# Altium PCB STM32_Board.PcbDoc (part 2 of 2)
Units mil, origin at the board's own origin, x right, y up, seen from the top; angles counter-clockwise.
Board outline 3248.03 x 2755.91 mil, 2 copper layers (Top Layer, Bottom Layer), stack 60.433 mil thick; 70 components, 76 nets, 326 pads, 150 vias.
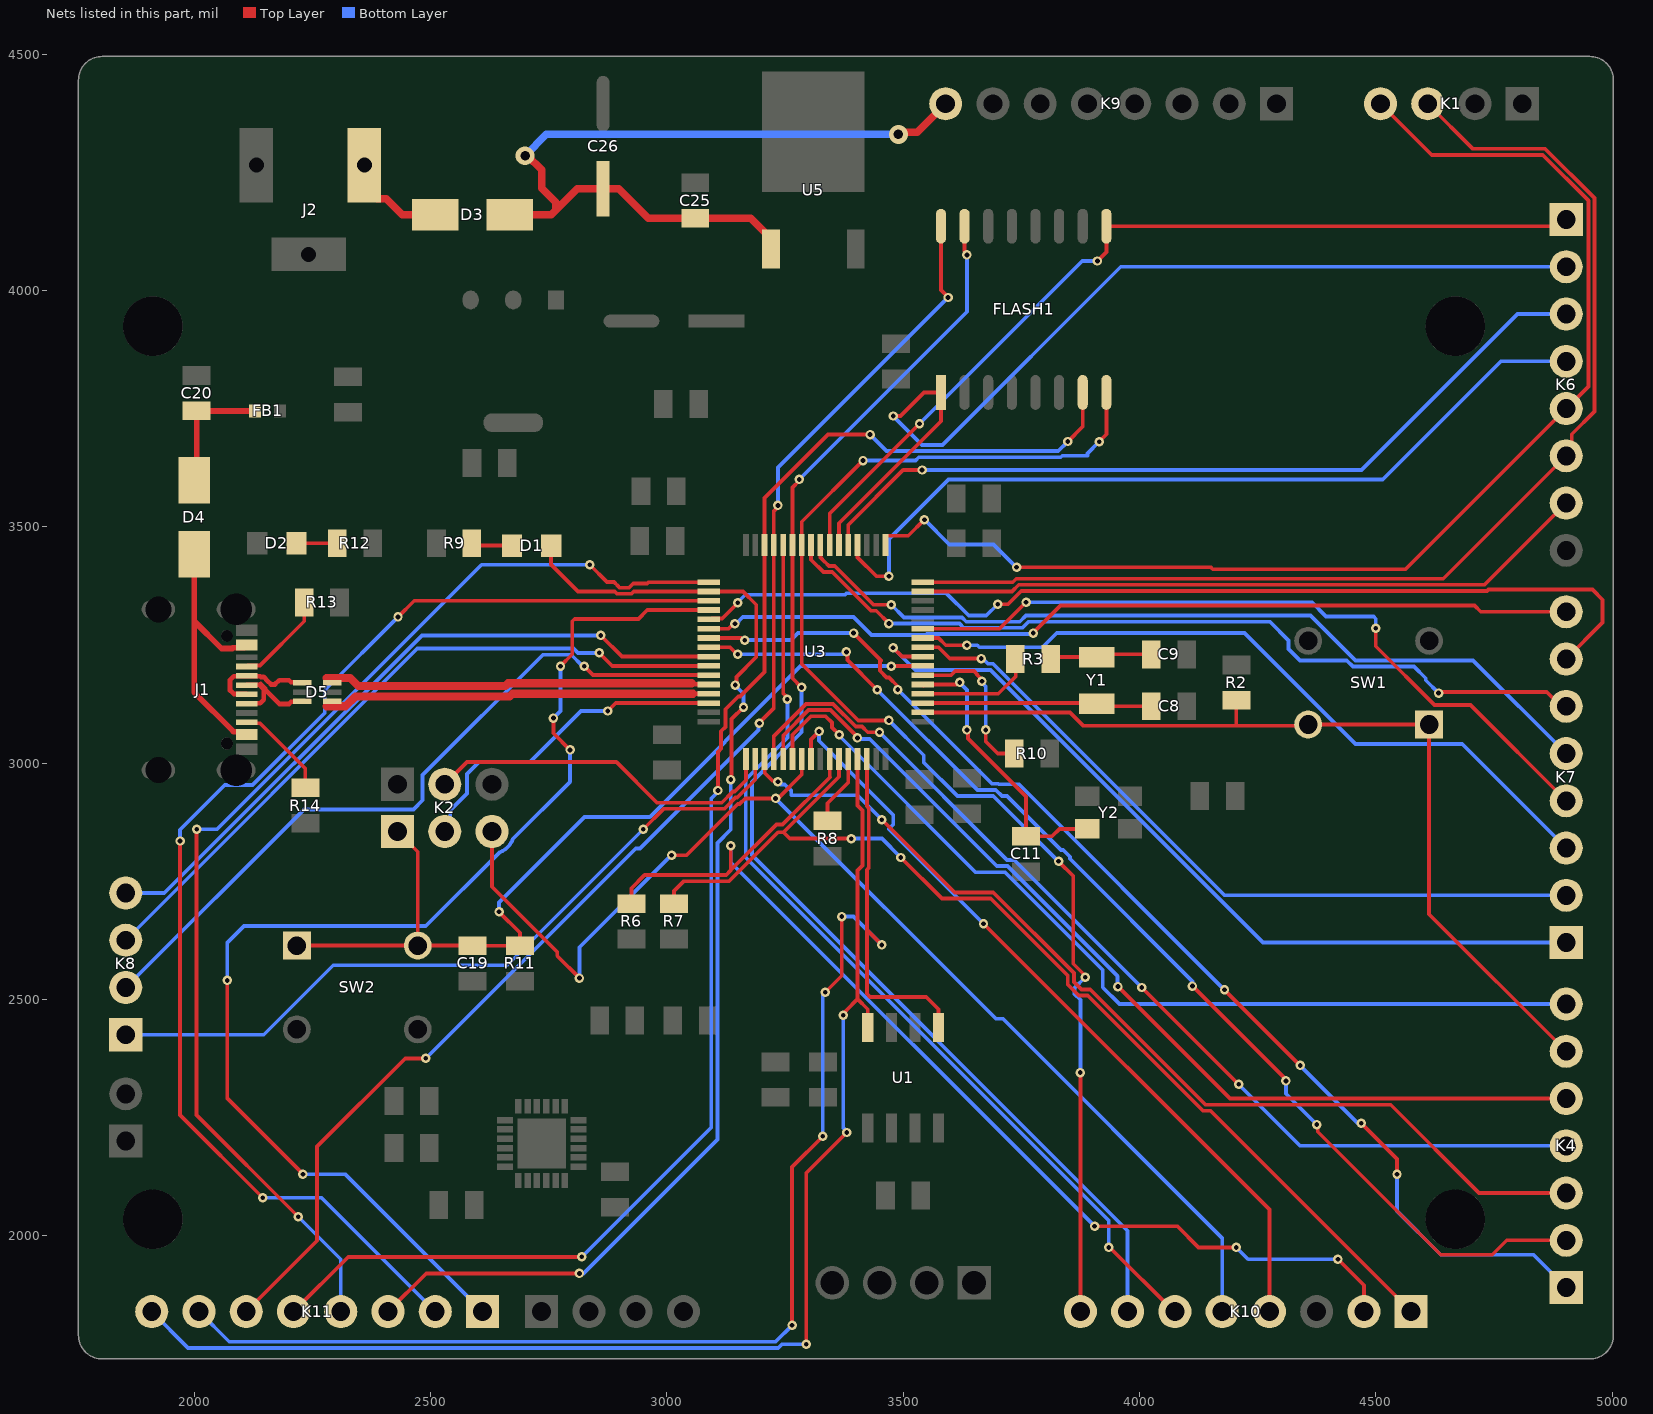
[diagram p2: the nets of this part, all layers, seen from the top]

## Via types
v1: diameter 20, hole 10, Top Layer to Bottom Layer, 139 vias
v2: diameter 59.06, hole 39.37, Top Layer to Bottom Layer, 5 vias
v3: diameter 19.68, hole 7.87, Top Layer to Bottom Layer, 4 vias
v4: diameter 40, hole 20, Top Layer to Bottom Layer, 2 vias

## Nets (pads, with @x,y where several pads share a name; then routed paths per layer and width w, separated by ;. In a path a pad name is that pad's centre, name@x,y a point inside that pad or via, vN(x,y) a via of type N, cw(c..) or ccw(c..) an arc to the next point about the centre after c; other vN are vias at no path point) (continued)
LED_Power_A: D2.2 R12.1 | length 86.3
  Top Layer w8: D2.2@2216.34,3465 R12.1@2302.6,3465
MCU_BOOT_0: R8.1 U3.60 | length 149.4
  Top Layer w8: R8.1@3340,2877.4 3340,2915 3383.9,2958.9 U3.60@3383.9,3008.62
MCU_CAN1_RX: K11.8 U1.4 U3.61 | length 2787.6
  Top Layer w8: v1(3295,1770) 3295,2132.7 v1(3380.49,2218.19) ; v1(3373.04,2466.33) 3373.04,2469.58 3378.88,2475.41 3378.88,2475.6 3403.58,2500.31 ; U3.61@3403.58,3008.62 3403.58,2910.06 3414,2899.65 3414,2783.13 3403.58,2772.72 3403.58,2500.31 ; U1.4@3425,2440 3425,2478.89 3403.58,2500.31
  Bottom Layer w8: K11.8@1910,1839.09 1986.87,1762.22 3235.61,1762.22 3243.38,1770 v1(3295,1770) ; v1(3373.04,2466.33) 3373.04,2228.88 3380.49,2221.43 v1(3380.49,2218.19)
MCU_CAN1_TX: K11.7 U1.1 U3.62 | length 3063.3
  Top Layer w8: v1(3265,1810) 3265,2145 v1(3330,2210) ; v1(3335,2515) 3370,2550 v1(3370,2675) ; U3.62@3423.27,3008.62 3423.27,2908.76 3427,2905.03 3427,2777.75 3423.27,2774.02 3423.27,2646.73 ; v1(3455,2615) 3423.27,2646.73 ; U1.1@3575,2440 3575,2478.89 3548.89,2505 3430,2505 3423.27,2511.73 3423.27,2646.73
  Bottom Layer w8: K11.7@2010,1839.09 2073.87,1775.22 3230.22,1775.22 v1(3265,1810) ; v1(3330,2210) 3330,2510 v1(3335,2515) ; v1(3370,2675) 3395,2675 v1(3455,2615)
MCU_LED_A: D1.2 R9.2 | length 87
  Top Layer w8: R9.2@2592.4,3460 D1.2@2672.32,3460
  Top Layer w12: R9.2@2587.4,3465 R9.2@2592.4,3460
MCU_LED_K: D1.1 K11.3 U3.34 | length 2541.1
  Top Layer w8: K11.3@2410,1839.09 2490.91,1920 v1(2815,1920) ; D1.1@2755,3460 2755,3420 2812.05,3362.95 2889.72,3362.95 2890.14,3362.53 2894.67,3358 2925.33,3358 2930.28,3362.95 3160.99,3362.95 3189,3334.94 3189,3224 3147.3,3182.3 3147.3,3167.3 v1(3145,3165) ; v1(3135,2965) 3137,2967 3137,3092.94 v1(3162.18,3118.12)
  Bottom Layer w8: v1(2815,1920) 2823.75,1920 3107,2203.25 3107,2830.94 3135,2858.94 v1(3135,2965) ; v1(3145,3165) 3145,3163.65 3162.18,3146.47 v1(3162.18,3118.12)
MCU_NRST: C19.2 K2.1 R11.2 SW2.1 SW2.2 U3.7 | length 1945.1
  Top Layer w8: SW2.1@2217.05,2613.58 SW2.2@2472.95,2613.58 ; K2.1@2430,2855 2472.95,2812.05 SW2.2@2472.95,2613.58 ; v1(2645,2685) 2689,2641 R11.2@2689,2613.15 C19.2@2589,2613.15 2588.57,2613.58 SW2.2@2472.95,2613.58 ; v1(3475,3205) 3475.24,3205.24 3541.14,3205.24 U3.7@3541.38,3205.47
  Bottom Layer w8: v1(2645,2685) 2645,2705 2826,2886 2964,2886 3283,3205 v1(3475,3205)
MCU_OSC32_IN: C8.2 U3.3 Y1.2 | length 486.6
  Top Layer w8: U3.3@3541.38,3126.73 3909.06,3126.73 Y1.2@3910,3125.79 3915.79,3120 C8.2@4025.2,3120
MCU_OSC32_OUT: R3.1 U3.4 | length 249.1
  Top Layer w8: U3.4@3541.38,3146.42 3701.42,3146.42 3738.16,3183.16 3738.16,3219.44 R3.1@3737.6,3220
MCU_OSC_IN: C11.2 U3.5 Y2.3 | length 624.5
  Top Layer w8: U3.5@3543.19,3164.29 U3.5@3541.38,3166.1 3612.44,3166.1 3616.75,3170.42 v1(3620,3170.42) ; v1(3635,3070.05) 3637.3,3067.75 3637.3,3051.7 3760,2928.99 C11.2@3760,2845 3815,2845 3830.55,2860.55 Y2.3@3889.72,2860.55 Y2.3@3874.17,2845
  Bottom Layer w8: v1(3620,3170.42) 3620,3169.3 3635,3154.3 v1(3635,3070.05)
MCU_OSC_OUT: R10.2 U3.6 | length 342.1
  Top Layer w8: U3.6@3541.38,3185.79 3601.43,3185.79 3610.06,3194.42 3649.69,3194.42 3656.17,3187.94 3656.17,3186.77 3666.69,3176.25 v1(3666.69,3173) ; v1(3675,3070.05) 3675,3045 3700,3020 R10.2@3735,3020
  Bottom Layer w8: v1(3666.69,3173) 3666.69,3169.75 3675,3161.45 v1(3675,3070.05)
MCU_PA1: K6.7 U3.15 | length 1439.1
  Top Layer w8: U3.15@3541.38,3362.95 3730.63,3362.95 3744.67,3377 4730.03,3377 K6.7@4903.03,3550
MCU_PA4: K6.4 U3.20 | length 1777.2
  Top Layer w8: U3.20@3403.58,3461.38 3403.58,3434.77 3443.35,3395 v1(3470,3395)
  Bottom Layer w8: v1(3470,3395) 3470,3473.94 3596.06,3600 4515,3600 4765,3850 K6.4@4903.03,3850
MCU_PA5: K6.3 U3.21 | length 1749
  Top Layer w8: U3.21@3385.71,3463.19 U3.21@3383.9,3461.38 3383.9,3503.9 3500,3620 v1(3540,3620)
  Bottom Layer w8: v1(3540,3620) 4470.13,3620 4800.13,3950 K6.3@4903.03,3950
MCU_PA8: K8.4 U3.41 | length 1477.9
  Top Layer w8: v1(2860,3270) 2904.84,3225.16 U3.41@3088.62,3225.16
  Bottom Layer w8: K8.4@1855,2725 1936.62,2725 2481.61,3270 v1(2860,3270)
MCU_PA9: K8.3 U3.42 | length 1504.3
  Top Layer w8: v1(2856.97,3233.03) 2884.53,3205.47 U3.42@3088.62,3205.47
  Bottom Layer w8: K8.3@1855,2625 2472,3242 2803.14,3242 2812.11,3233.03 v1(2856.97,3233.03)
MCU_PA10: K8.2 U3.43 | length 1574.2
  Top Layer w8: v1(2825,3205) 2843.56,3186.44 3087.97,3186.44 U3.43@3088.62,3185.79
  Bottom Layer w8: K8.2@1855,2525 2231.87,2901.87 2463.67,2901.87 2483.13,2921.33 2483.13,2974.42 2737.71,3229 2797.75,3229 2821.75,3205 v1(2825,3205)
MCU_PA15: K8.1 U3.50 | length 1599.5
  Top Layer w8: v1(2950,2860) 2993,2903 3121.62,2903 3145.33,2926.71 3149.04,2926.71 3187.05,2964.72 U3.50@3187.05,3008.62
  Bottom Layer w8: K8.1@1855,2425 2147.08,2425 2294.26,2572.18 2662.18,2572.18 v1(2950,2860)
MCU_PB2: K10.6 U3.28 | length 2040.9
  Top Layer w8: U3.28@3246.1,3461.38 3246.1,3147.14 3255,3138.25 v1(3255,3135) ; v1(3935,1975) 3937.05,1975 4072.95,1839.09 K10.6@4075,1839.09
  Bottom Layer w8: v1(3255,3135) 3255,3053.38 3167,2965.38 3167,2800.05 3935,2032.05 v1(3935,1975)
MCU_PB4: K10.4 U3.56 | length 1694.9
  Top Layer w8: U3.56@3305.16,3008.62 3305.16,3049.86 v1(3322.03,3066.74) ; v1(3670,2660) 4275,2055 K10.4@4275,1839.09
  Bottom Layer w8: v1(3322.03,3066.74) 3322.03,3046.91 3479,2889.94 3479,2870.06 3470,2861.06 3470,2860 v1(3670,2660)
MCU_PB12: K11.4 U3.33 | length 2487.7
  Top Layer w8: v1(2005,2860) 2005,2255 v1(2220,2040) ; v1(2836.99,3419.66) 2873.62,3383.03 2888.03,3383.03 2890,3381.06 2890.53,3380.53 2895,3376.06 2895.53,3375.53 2900.06,3371 2919.94,3371 2928.94,3380 2958.46,3380 2961.1,3382.64 U3.33@3088.62,3382.64
  Bottom Layer w8: v1(2005,2860) 2048.45,2860 2608.11,3419.66 v1(2836.99,3419.66) ; v1(2220,2040) 2310,1950 K11.4@2310,1839.09
MCU_PB14: K11.2 U3.35 | length 2663.6
  Top Layer w8: v1(1970,2835) 1970,2255 v1(2145,2080) ; v1(2431.09,3309.05) 2465.3,3343.27 U3.35@3088.62,3343.27
  Bottom Layer w8: v1(1970,2835) 1970,2858.94 2064.42,2953.36 2123.43,2953.36 2276.11,3106.04 2276.11,3154.07 v1(2431.09,3309.05) ; v1(2145,2080) 2269.09,2080 K11.2@2510,1839.09
MCU_PB15: K11.1 U3.36 | length 2593.5
  Top Layer w8: v1(2070,2540) 2070,2290 v1(2230,2130) ; v1(2760,3095) 2760,3062.79 v1(2795.13,3027.66) ; v1(2775,3205) 2800,3230 2800,3300 2805,3305 2940,3305 2958.58,3323.58 U3.36@3088.62,3323.58
  Bottom Layer w8: v1(2070,2540) 2070,2620 2105,2655 2490,2655 2645.91,2810.91 ccw(c2630,2855) 2674.09,2839.09 2795.13,2960.13 v1(2795.13,3027.66) ; v1(2230,2130) 2319.09,2130 K11.1@2610,1839.09 ; v1(2760,3095) 2775,3110 v1(2775,3205)
MCU_PC0: K7.1 U3.8 | length 1753.4
  Top Layer w8: v1(3478.63,3243.96) 3497.43,3225.16 U3.8@3541.38,3225.16
  Bottom Layer w8: v1(3478.63,3243.96) 3525.59,3197 3684.62,3197 4261.62,2620 K7.1@4903.03,2620
MCU_PC1: K7.2 U3.9 | length 1579.1
  Top Layer w8: U3.9@3541.38,3244.84 3574.58,3244.84 3598.43,3221 v1(3665,3221)
  Bottom Layer w8: v1(3665,3221) 3668.25,3221 3679.25,3210 3690,3210 4180,2720 K7.2@4903.03,2720
MCU_PC2: K7.3 U3.10 | length 1570.6
  Top Layer w8: U3.10@3541.38,3264.53 3574.53,3264.53 3590.06,3249 v1(3635,3249)
  Bottom Layer w8: v1(3635,3249) 3657,3249 3661,3245 3795,3245 3825,3275 4222.02,3275 4457,3040.02 4683.02,3040.02 K7.3@4903.03,2820
MCU_PC3: K7.4 U3.11 | length 1592.8
  Top Layer w8: U3.11@3541.38,3284.21 3704.21,3284.21 v1(3760,3340) ; v1(4500,3285) 4500,3247.12 4624.3,3122.82 4700.21,3122.82 K7.4@4903.03,2920
  Bottom Layer w8: v1(3760,3340) 4365,3340 4395,3310 4495.31,3310 4500,3305.31 v1(4500,3285)
MCU_PC4: K7.5 U3.24 | length 1787.4
  Top Layer w8: U3.24@3324.84,3461.38 3324.84,3434.77 3333.61,3426 3334,3426 3343,3417 3355.33,3417 3437.33,3335 v1(3475,3335)
  Bottom Layer w8: v1(3475,3335) 3502,3308 3624.38,3308 3633.38,3299 3746.67,3299 3759.67,3312 4362.18,3312 4457,3217.18 4705.85,3217.18 K7.5@4903.03,3020
MCU_PC5: K7.6 U3.25 | length 1782.7
  Top Layer w8: U3.25@3305.16,3461.38 3305.16,3430.24 3331.39,3404 3349.94,3404 3431.94,3322 3443,3322 v1(3470,3295) ; v1(4633.03,3148.03) 4635,3150 4861.97,3150 4891.97,3120 K7.6@4903.03,3120
  Bottom Layer w8: v1(3470,3295) 3618.99,3295 3627.99,3286 3752.06,3286 3765.06,3299 4276,3299 4315.65,3259.35 4315.65,3241.43 4339.9,3217.18 4438.61,3217.18 4451.61,3204.18 4580.82,3204.18 4605.78,3179.22 4605.78,3175.28 v1(4633.03,3148.03)
MCU_PC6: K7.7 U3.37 | length 2116.2
  Top Layer w8: U3.37@3095,3305.71 3117.04,3305.71 3150,3338.67 v1(3150,3338.95) ; v1(3700,3336) 3722.06,3336 3750.06,3364 4735.42,3364 4738.29,3366.87 4958.44,3366.87 4980,3345.31 4980,3296.97 K7.7@4903.03,3220
  Bottom Layer w8: v1(3150,3338.95) 3150,3340 3166,3356 3377.38,3356 3380.38,3359 3591.76,3359 3638.76,3312 3676,3312 v1(3700,3336)
MCU_PC7: K7.8 U3.38 | length 1871.5
  Top Layer w8: U3.38@3088.62,3284.21 3130.66,3284.21 3140.87,3294.42 v1(3144.12,3294.42) ; v1(3775,3275) 3832.98,3332.98 4709.17,3332.98 4722.14,3320 K7.8@4903.03,3320
  Bottom Layer w8: v1(3144.12,3294.42) 3146.06,3294.42 3160.65,3309 3394.94,3309 3432.94,3271 3548.5,3271 3550.5,3273 3773,3273 v1(3775,3275)
MCU_PC8: K4.1 U3.39 | length 2480.7
  Top Layer w8: U3.39@3088.62,3264.53 3088.86,3264.76 3156.99,3264.76 3161.75,3260 v1(3165,3260) ; v1(3395,3275) 3453.03,3216.97 3451,3214.94 3451,3195.06 3465.06,3181 3470,3181 3488.59,3162.41 v1(3488.59,3155.43) ; v1(4180,2520) v1(4340,2360) ; v1(4469.62,2237.46) 4545,2162.08 v1(4545,2130)
  Bottom Layer w8: v1(3165,3260) 3262.5,3260 3277.5,3275 v1(3395,3275) ; v1(3488.59,3155.43) 3688.02,2956 3701.41,2956 3702.29,2955.12 3744.88,2955.12 v1(4180,2520) ; v1(4340,2360) 4462.54,2237.46 v1(4469.62,2237.46) ; v1(4545,2130) 4545,2051.88 4637.38,1959.5 4833.53,1959.5 K4.1@4903.03,1890
MCU_PC9: K4.2 U3.40 | length 2406.2
  Top Layer w8: U3.40@3088.62,3244.84 3133.73,3244.84 3148.57,3230 v1(3150,3230) ; v1(3380,3235) 3382.3,3232.7 3382.3,3217.7 v1(3445,3155) ; v1(4112.18,2527.92) 4310.01,2330.08 v1(4310.01,2327.35) ; v1(4375,2235) 4377.3,2232.7 4377.3,2219.58 4637.38,1959.5 4746.57,1959.5 4777.06,1990 K4.2@4903.03,1990
  Bottom Layer w8: v1(3150,3230) 3371.75,3230 3376.75,3235 v1(3380,3235) ; v1(3445,3155) 3657,2943 3696.02,2943 3709.02,2930 3720,2930 3834.15,2815.85 3838.73,2815.85 3852.79,2801.79 3852.79,2797.21 4112.18,2537.82 v1(4112.18,2527.92) ; v1(4310.01,2327.35) 4310.01,2299.99 v1(4375,2235)
MCU_PC10: K4.3 U3.51 | length 2110.2
  Top Layer w8: U3.51@3206.73,3008.62 3207.21,3008.15 3207.21,2978.63 3223.32,2962.52 3232.67,2962.52 v1(3234.97,2960.22) ; v1(3455,2880) 3609,2726 3690.77,2726 3861.23,2555.54 3861.23,2536.78 3877.07,2520.95 3895.82,2520.95 4139.77,2277 4531.63,2277 4718.63,2090 K4.3@4903.03,2090
  Bottom Layer w8: v1(3234.97,2960.22) 3240.63,2954.56 3249.38,2954.56 3263.44,2940.5 3263.44,2931.74 3403.26,2931.74 v1(3455,2880)
MCU_PC11: K4.4 U3.52 | length 2140.5
  Top Layer w8: U3.52@3226.42,3008.62 3226.42,3057.13 3294.29,3125 3351.62,3125 3399.62,3077 3413.22,3077 3425.22,3065 v1(3450,3065) ; v1(4005,2525) v1(4210,2320)
  Bottom Layer w8: v1(3450,3065) 3720,2795 3735,2795 v1(4005,2525) ; v1(4210,2320) 4340,2190 K4.4@4903.03,2190
MCU_PC12: K4.5 U3.53 | length 2083
  Top Layer w8: U3.53@3246.1,3008.62 3246.1,3058.43 3299.67,3112 3346.23,3112 3403.28,3054.95 v1(3403.28,3053) ; v1(3954.52,2526.96) 4191.48,2290 K4.5@4903.03,2290
  Bottom Layer w8: v1(3403.28,3053) 3405.56,3050.72 3429.28,3050.72 3698,2782 3720.67,2782 3953.7,2548.96 3953.7,2527.77 v1(3954.52,2526.96)
MCU_PD2: K4.7 U3.54 | length 1985.8
  Top Layer w8: U3.54@3265.79,3008.62 3265.79,3059.73 3305.06,3099 3336,3099 3349.17,3085.83 3349.17,3075.29 3364.64,3059.82 v1(3364.64,3059.64)
  Bottom Layer w8: v1(3364.64,3059.64) 3364.64,3057.69 3653.34,2769 3715.28,2769 3922.23,2562.05 3922.23,2525.3 3957.54,2490 K4.7@4903.03,2490
MCU_QUADSPI_BK1_IO0: FLASH1.15 K10.7 U3.27 | length 2832.5
  Top Layer w8: v1(3280,3600) 3280,3597.31 3265.79,3583.1 U3.27@3265.79,3461.38 3265.79,3179.21 v1(3285,3160) ; FLASH1.15@3630,4135.83 3630,4083.25 3635,4078.25 v1(3635,4075)
  Bottom Layer w8: v1(3280,3600) 3635,3955 v1(3635,4075) ; v1(3285,3160) 3285,3065 3180,2960 3180,2805.44 3975,2010.44 K10.7@3975,1839.09
MCU_QUADSPI_BK1_IO1: FLASH1.8 K10.8 U3.26 | length 2830.6
  Top Layer w8: v1(3415,3640) 3285.47,3510.47 U3.26@3285.47,3461.38 3285.47,3209.53 3405,3090 v1(3470,3090) ; v1(3828.79,2791.85) 3860,2760.64 3860,2575.15 3885.23,2549.92 v1(3885.23,2546.72) ; K10.8@3875,1839.09 v1(3875,2345) ; v1(3914.71,3679.77) 3914.71,3680.3 3930,3695.59 FLASH1.8@3930,3784.17
  Bottom Layer w8: v1(3415,3640) 3526.06,3640 3533.06,3647 3833.58,3647 3836.58,3650 3890,3650 3890,3655.07 v1(3914.71,3679.77) ; v1(3470,3090) 3543.65,3016.35 3543.65,3001.35 3615,2930 3690.64,2930 v1(3828.79,2791.85) ; K10.8@3874.31,1839.78 K10.8@3875,1839.09 ; v1(3875,2345) 3875,2498.89 3862.76,2511.13 3862.76,2524.25 v1(3885.23,2546.72)
MCU_QUADSPI_BK1_IO2: FLASH1.9 K6.1 U3.23 | length 1914.7
  Top Layer w8: U3.23@3344.53,3461.38 3344.53,3527.69 v1(3534.62,3717.79) ; v1(3911.18,4062.22) 3930,4081.04 FLASH1.9@3930,4135.83 4888.86,4135.83 K6.1@4903.03,4150
  Bottom Layer w8: v1(3534.62,3717.79) 3879.06,4062.22 v1(3911.18,4062.22)
MCU_QUADSPI_BK1_IO3: FLASH1.1 K6.2 U3.22 | length 2151.9
  Top Layer w8: U3.22@3362.4,3450 3364.21,3451.81 U3.22@3364.21,3461.38 3364.21,3507.28 3580,3723.07 3580,3757.95 FLASH1.1@3580,3784.17 3544.17,3784.17 3494.21,3734.21 v1(3478.81,3734.21)
  Bottom Layer w8: v1(3478.81,3734.21) 3540.02,3673 3583.29,3673 3960.29,4050 K6.2@4903.03,4050
MCU_QUADSPI_CLK: FLASH1.16 K11.6 U3.29 | length 2948.7
  Top Layer w8: K11.6@2110,1839.09 2259.93,1989.02 2259.93,2188.34 2446.59,2375 v1(2490,2375) ; v1(3195.97,3084.03) 3195.97,3085.97 3226.42,3116.42 U3.29@3226.42,3461.38 3226.42,3533.17 3235,3541.75 v1(3235,3545) ; FLASH1.16@3580,4135.83 3580,4001.11 3595,3986.11 v1(3595,3985)
  Bottom Layer w8: v1(2490,2375) 2934,2819 2942.94,2819 3193.68,3069.73 3193.68,3081.73 v1(3195.97,3084.03) ; v1(3235,3545) 3235,3625 v1(3595,3985)
MCU_QUADSPI_NCS: FLASH1.7 K11.5 U3.30 | length 3263.3
  Top Layer w8: K11.5@2210,1839.09 2325.91,1955 v1(2820,1955) ; v1(3108.14,2941.86) 3108.14,3023.46 3114.69,3030 3114.69,3067.13 3124,3076.44 3124,3113.88 3151.12,3141 3154.94,3141 3206.73,3192.79 U3.30@3206.73,3461.38 3206.73,3560.67 3341.06,3695 v1(3430,3695) ; v1(3848.52,3680.33) 3880,3711.81 FLASH1.7@3880,3784.17
  Bottom Layer w8: v1(2820,1955) 3094,2229 3094,2924.89 3108.14,2939.03 v1(3108.14,2941.86) ; v1(3430,3695) 3465,3660 3828.19,3660 v1(3848.52,3680.33)
MCU_SCL_1: K10.2 R6.2 U3.58 | length 2445.3
  Top Layer w8: R6.2@2925,2702.4 2925,2735 2953,2763 3125.51,2763 3135,2772.49 3135,2772.9 ; v1(3135,2825) 3135,2772.9 ; U3.58@3342.72,3006.81 U3.58@3344.53,3008.62 3344.53,2970.47 3345,2970 3245,2870 3232.1,2870 3135,2772.9 ; v1(3905,2020) 4080,2020 4125,1975 v1(4205,1975) ; v1(4420,1950) 4475,1895 K10.2@4475,1839.09
  Bottom Layer w8: v1(3135,2825) 3135,2790 v1(3905,2020) ; v1(4205,1975) 4230,1950 v1(4420,1950)
MCU_SDA_1: K10.1 R7.2 U3.59 | length 2273.2
  Top Layer w8: R7.2@3015,2702.4 3015.39,2702.79 3015.39,2729.4 3035.99,2750 3132.2,2750 3235.49,2853.29 3246.71,2853.29 ; U3.59@3364.21,3008.62 3364.21,2970.79 3246.71,2853.29 ; v1(3390,2840) 3260,2840 3246.71,2853.29 ; v1(3495,2800) 3582,2713 3685.38,2713 3848.23,2550.15 3848.23,2531.4 3871.68,2507.95 3890.43,2507.95 4134.38,2264 4150.09,2264 K10.1@4575,1839.09
  Bottom Layer w8: v1(3390,2840) 3455,2840 v1(3495,2800)
MCU_SWCLK: K2.4 U3.49 | length 757.2
  Top Layer w8: K2.4@2530,2955 2576.87,3001.87 2893.13,3001.87 2979,2916 3116.23,2916 3139.94,2939.71 3143.65,2939.71 3167.36,2963.42 U3.49@3167.36,3008.62
MCU_SWDIO: K2.3 U3.46 | length 731.6
  Top Layer w8: v1(2875,3110) 2891.73,3126.73 U3.46@3088.62,3126.73
  Bottom Layer w8: K2.3@2541.86,2843.14 K2.3@2530,2855 2541.86,2866.86 2541.86,2900.57 2576.87,2935.58 2576.87,2976.44 2602.5,3002.06 2710.43,3002.06 2818.37,3110 v1(2875,3110)
MCU_SWITCH: K4.6 R2.2 SW1.1 SW1.2 U3.2 | length 1954.3
  Top Layer w8: U3.2@3541.38,3107.05 3852.89,3107.05 3881.34,3078.6 4205,3078.6 ; R2.2@4207.95,3129.65 R2.2@4205,3132.6 4205,3078.6 ; K4.6@4903.03,2390 4612.95,2680.08 SW1.1@4612.95,3081.42 SW1.2@4357.05,3081.42 4354.23,3078.6 4205,3078.6
MCU_SWO: K2.5 K10.5 U3.55 | length 2592.8
  Top Layer w8: K2.5@2630,2855 2630,2738.16 2768.07,2600.08 2768.07,2591.93 v1(2815,2545) ; v1(3010,2805) 3042,2805 3150,2913 3153.71,2913 3165.71,2925 v1(3230,2925) 3232.3,2927.3 3237.3,2927.3 3285.47,2975.47 U3.55@3285.47,3008.62
  Bottom Layer w8: v1(2815,2545) 2815,2610 v1(3010,2805) ; v1(3230,2925) 3696.15,2458.85 3711.15,2458.85 4175,1995 K10.5@4175,1839.09
MCU_USART2_RX: K1.4 K6.5 U3.17 | length 2641.4
  Top Layer w8: U3.17@3462.64,3461.38 3462.64,3478.88 3464.64,3480.88 3510.88,3480.88 v1(3545,3515) ; v1(3740,3414) 4151.14,3414 4155.14,3410 4563.03,3410 K6.5@4903.03,3750 4949.91,3796.87 4949.91,4189.92 4853.3,4286.53 4618.47,4286.53 K1.4@4510,4395
  Bottom Layer w8: v1(3545,3515) 3597.5,3462.5 3691.5,3462.5 v1(3740,3414)
MCU_USART2_TX: K1.3 K6.6 U3.16 | length 2478.1
  Top Layer w8: U3.16@3541.38,3382.64 3731.93,3382.64 3739.29,3390 4643.03,3390 K6.6@4903.03,3650 4914.9,3661.86 4914.9,3695.57 4962.91,3743.58 4962.91,4195.3 4858.68,4299.53 4705.47,4299.53 K1.3@4610,4395
NetJ1_A5: J1.A5 R13.2 | length 201
  Top Layer w8: J1.A5@2111.34,3204.21 2113.24,3206.12 2138.89,3206.12 2232.6,3299.82 R13.2@2232.6,3340
NetJ1_B5: J1.B5 R14.2 | length 204.9
  Top Layer w8: J1.B5@2111.34,3086.1 2113.24,3084.2 2138.89,3084.2 2235,2988.09 R14.2@2235,2947.4
USB_CONN_D_N: D5.1 J1.A7 J1.B7 | length 231.2
  Top Layer w10: J1.A7@2111.34,3145.16 2110.43,3146.06 2083.37,3146.06 2075.83,3153.6 2075.83,3176.08 2083.37,3183.62 2110.43,3183.62 J1.B7@2111.34,3184.53 2112.24,3183.62 2139.31,3183.62 2140.75,3182.19 2146.96,3182.19 2155.75,3173.4 2155.75,3172.97 2162.54,3166.18 2170.82,3166.18 2179.64,3175 2200.36,3175 2204.76,3170.59 2227.4,3170.59 D5.1@2228.31,3169.68
USB_CONN_D_P: D5.3 J1.A6 J1.B6 | length 211.7
  Top Layer w10: J1.B6@2111.34,3125.47 2112.24,3126.38 2139.31,3126.38 2146.85,3133.92 2146.85,3156.4 2139.31,3163.94 ; J1.A6@2111.34,3164.84 2112.24,3165.75 2139.31,3165.75 2140.75,3167.19 2140.75,3166.75 2150,3157.5 2150,3154.64 2179.64,3125 2200.36,3125 2204.76,3129.41 2227.4,3129.41 D5.3@2228.31,3130.32
USB_D_N: D5.6 U3.44 | length 819.1
  Top Layer w10: 3052.8,3168.83 3054.72,3166.91 3087.81,3166.91 U3.44@3088.62,3166.1
  Top Layer w17.23: 2280,3180 2330,3180 2346.9,3163.1 2658.27,3163.1 2664,3168.83 3052.8,3168.83
USB_D_P: D5.4 U3.45 | length 819.7
  Top Layer w10: 3055.66,3146.59 3088.44,3146.59 U3.45@3088.62,3146.42
  Top Layer w17.23: 2280,3120 2320,3120 2340.87,3140.87 2667.48,3140.87 2673.2,3146.59 3055.66,3146.59
VBUS: C20.2 D4.1 FB1.1 | length 272
  Top Layer w12: D4.1@2000,3598.74 2005,3603.74 C20.2@2005,3745.2 2005.2,3745 FB1.1@2128.43,3745
VBUS_IN: D4.2 J1.A4-B9 J1.B4-A9 | length 593.4
  Top Layer w12: 2000,3315 2000,3300.08 ; D4.2@2000,3441.26 2000,3300.08 ; J1.B4-A9@2111.34,3060.51 2105.53,3066.32 2082.95,3066.32 2000,3149.28 2000,3300.08 ; J1.A4-B9@2111.34,3249.49 2105.53,3243.68 2081.63,3243.68 2080.06,3242.11 2057.97,3242.11 2000,3300.08
VDC_IN: D3.2 J2.1 | length 218.9
  Top Layer w16: J2.1@2360,4265 2360,4221.69 2387.43,4194.26 2405.74,4194.26 2440,4160 D3.2@2510,4160
VIN: C25.1 C26.+ D3.1 K9.8 U5.1 | length 1738.5
  Top Layer w16: D3.1@2667.48,4160 2755,4160 2765,4170 ; v4(2700,4285) 2705,4285 2735,4255 2735,4216.51 2765,4186.51 2765,4170 ; C25.1@3081.53,4164.28 C25.1@3069.84,4152.6 ; U5.1@3220.24,4087.68 3220.24,4110.31 3177.95,4152.6 C25.1@3069.84,4152.6 ; v4(3490,4330) 3494.59,4334.59 3529.59,4334.59 K9.8@3590,4395 ; 2765,4170 2810,4215 C26.+@2865,4215 2897.9,4215 2960.3,4152.6 C25.1@3060,4152.6 C25.1@3069.84,4152.6
  Bottom Layer w16: v4(2700,4285) 2745,4330 v4(3490,4330)
XTAL32_IN: C9.2 R3.2 Y1.1 | length 216.7
  Top Layer w8: R3.2@3812.4,3220 3816.61,3224.21 Y1.1@3910,3224.21 3915.79,3230 C9.2@4025,3230
pads on no net: FLASH1.4 FLASH1.5 FLASH1.6 FLASH1.11 FLASH1.12 FLASH1.13 FLASH1.14 J1. J1.1 J1.2 J1.3 J1.4 J1.A8 J1.B8 U1.5 U1.8 U2.2 U2.3 U2.4 U2.5 U2.14 U2.15 U2.16 U2.17 U2.19 U2.21 U2.22

## Polygon pours and split planes (outlines as drawn)
GND on Bottom Layer "GND_L02_P003" (solid, pour order 3): 1755,1789.09 ccw(c1805,1789.09) 1805,1739.09 4953.03,1739.09 ccw(c4953.03,1789.09) 5003.03,1789.09 5003.03,4445 ccw(c4953.03,4445) 4953.03,4495 1805,4495 ccw(c1805,4445) 1755,4445
GND on Top Layer "GND_L01_P002" (solid, remove dead copper, pour order 2): 1755,1789.09 ccw(c1805,1789.09) 1805,1739.09 4953.03,1739.09 ccw(c4953.03,1789.09) 5003.03,1789.09 5003.03,4445 ccw(c4953.03,4445) 4953.03,4495 1805,4495 ccw(c1805,4445) 1755,4445

## Keep-outs
Top Layer:
  lines w12: 5002.95,4440.42 5003.03,1789.09 cw(c4953.03,1789.09) 4988.39,1753.74 4984.9,1750.26 cw(c4957.96,1777.21) 4957.96,1739.09 ; 5002.95,4445.2 ccw(c4953.23,4445.2) 4988.39,4480.36 ccw(c4953.03,4445) 4953.03,4495 1800.08,4495 ccw(c1800.08,4456.89) 1773.13,4483.84 1766.16,4476.87 ccw(c1793.11,4449.92) 1755,4449.92 ; 1755,1784.17 ccw(c1793.11,1784.17) 1766.16,1757.22 1773.13,1750.26 ccw(c1800.08,1777.21) 1800.08,1739.09 4957.96,1739.09 ; 1755,1784.17 1755,4449.92 ; 1755,1784.17 1755,1784.17 ; 1755,4449.92 1755,4449.92 ; 4957.96,1739.09 4957.96,1739.09
Bottom Layer:
  lines w12: 4745,1740 ccw(c4747.19,1742.19) 4747.19,1739.09 ; 4988.39,4480.36 4984.9,4483.84 ccw(c4957.96,4456.89) 4957.96,4495 1800.08,4495 ccw(c1800.08,4456.89) 1773.13,4483.84 1766.16,4476.87 ccw(c1793.11,4449.92) 1755,4449.92 1755,1784.17 ; 4991.87,4476.87 cw(c4964.66,4449.66) 5003.14,4449.66 5003.14,4441.27 5003.14,1784.43 cw(c5002.77,1784.43) 5003.03,1784.17 cw(c4964.92,1784.17) 4991.87,1757.22 4984.9,1750.26 cw(c4957.96,1777.21) 4957.96,1739.09 ; 1755,1784.17 ccw(c1793.11,1784.17) 1766.16,1757.22 1773.13,1750.26 ccw(c1800.08,1777.21) 1800.08,1739.09 4747.19,1739.09 ; 1755,1784.17 1755,1784.17 ; 4747.19,1739.09 4957.96,1739.09 ; 4957.96,1739.09 4957.96,1739.09

## Silkscreen, mask and mechanical layers (free items; w line width, h text height)
Top Overlay:
  lines w12: 2340,3020 2340,3030 2350,3030 2350,3020 2340,3020
  text "DC12V" at 2425,4415 h60
  text "VIN" at 3576,4314 h40 r270
  text "5V" at 3676,4314 h40 r270
  text "5V" at 3776,4314 h40 r270
  text "3V3" at 3876,4314 h40 r270
  text "3V3" at 3976,4314 h40 r270
  text "GND" at 4076,4314 h40 r270
  text "GND" at 4176,4314 h40 r270
  text "GND" at 4276,4314 h40 r270
  text "RX" at 4496,4314 h40 r270
  text "TX" at 4596,4314 h40 r270
  text "GND" at 4696,4314 h40 r270
  text "3V3" at 4796,4314 h40 r270
  text "A7" at 4750,4130 h40
  text "POWER" at 4015,4115 h60
  text "UART" at 4425,4115 h60
  text "A6" at 4750,4030 h40
  text "FLASH" at 4010,3970 h60 r270
  text "A5" at 4750,3930 h40
  text "A4" at 4750,3830 h40
  text "A3" at 4750,3730 h40
  text "A2" at 4750,3630 h40
  text "POWER" at 2110,3540 h60
  text "MCU" at 3130,3530 h60
  text "A1" at 4750,3530 h40
  text "A0" at 4750,3430 h40
  text "PORTA" at 4685,3425 h60 r90
  text "SWITCH" at 4225,3360 h60
  text "C7" at 4750,3300 h40
  text "C6" at 4750,3200 h40
  text "C5" at 4750,3100 h40
  text "SWD" at 2390,3050 h60
  text "C4" at 4750,3000 h40
  text "C3" at 4750,2900 h40
  text "USB" at 1825,2860 h60
  text "C2" at 4750,2800 h40
  text "PORTA" at 2065,2770 h60 r270
  text "A8" at 1936,2711 h40
  text "C1" at 4750,2700 h40
  text "RESET" at 2210,2690 h60
  text "STM32L4 Series Board" at 3390,2630 h60
  text "A9" at 1936,2611 h40
  text "C0" at 4750,2600 h40
  text "Designed in Poland" at 3400,2529.99 h60
  text "A10" at 1936,2511 h40
  text "D2" at 4730,2470 h40
  text "PORTC" at 4665,2465 h60 r90
  text "A15" at 1936,2411 h40
  text "C13" at 4730,2370 h40
  text "AUX SDA" at 1936,2286 h40
  text "C12" at 4730,2270 h40
  text "AUX SCL" at 1936,2186 h40
  text "C11" at 4730,2170 h40
  text "C10" at 4730,2070 h40
  text "PORTB" at 3845,2050 h60
  text "PORTB" at 2035,2045 h60
  text "I2C" at 2980,2045 h60
  text "C9" at 4730,1970 h40
  text "B0" at 3889,1920.09 h40 r90
  text "B1" at 3989,1920.09 h40 r90
  text "B2" at 4089,1920.09 h40 r90
  text "B3" at 4189,1920.09 h40 r90
  text "B4" at 4289,1920.09 h40 r90
  text "B5" at 4389,1920.09 h40 r90
  text "B6" at 4489,1920.09 h40 r90
  text "B7" at 4589,1920.09 h40 r90
  text "B9" at 2010,1918.49 h40 r45
  text "B10" at 2110,1913.49 h40 r45
  text "B11" at 2210,1913.49 h40 r45
  text "B12" at 2310,1913.49 h40 r45
  text "B13" at 2410,1913.49 h40 r45
  text "B14" at 2510,1913.49 h40 r45
  text "B15" at 2610,1913.49 h40 r45
  text "3V3" at 2735,1913.49 h40 r45
  text "GND" at 2835,1913.49 h40 r45
  text "SDA" at 2935,1913.49 h40 r45
  text "SCL" at 3035,1913.49 h40 r45
  text "C8" at 4730,1870 h40
  text "CAN" at 3270,1835 h60 r90
  text "B8" at 1819,1796 h40 r90
Mechanical 1:
  lines w8: 1755,1789.09 ccw(c1805,1789.09) 1805,1739.09 1860.91,1739.09 4899.09,1739.09 4953.03,1739.09 ccw(c4953.03,1789.09) 5003.03,1789.09 5003.03,1843.03 5003.03,4391.97 5003.03,4445 ccw(c4953.03,4445) 4953.03,4495 4900,4495 1865,4495 1805,4495 ccw(c1805,4445) 1755,4445 1755,4385 1755,1845 1755,1789.09

## Text inside footprints (layer, text, board x,y; h text height)
C23: Top Overlay "+" at 3099.65,3922.2 h35 r180
C26: Top Overlay "+" at 2852.2,4220.35 h35 r90